# Altium PCB CatToy2.PcbDoc
Units mm, origin at the board's own origin, x right, y up, seen from the top; angles counter-clockwise.
Board outline 47.37 x 20.57 mm, 2 copper layers (Top Layer, Bottom Layer); 18 components, 16 nets, 69 pads, 10 vias.
Unrouted connection lines stored in the file: 15.
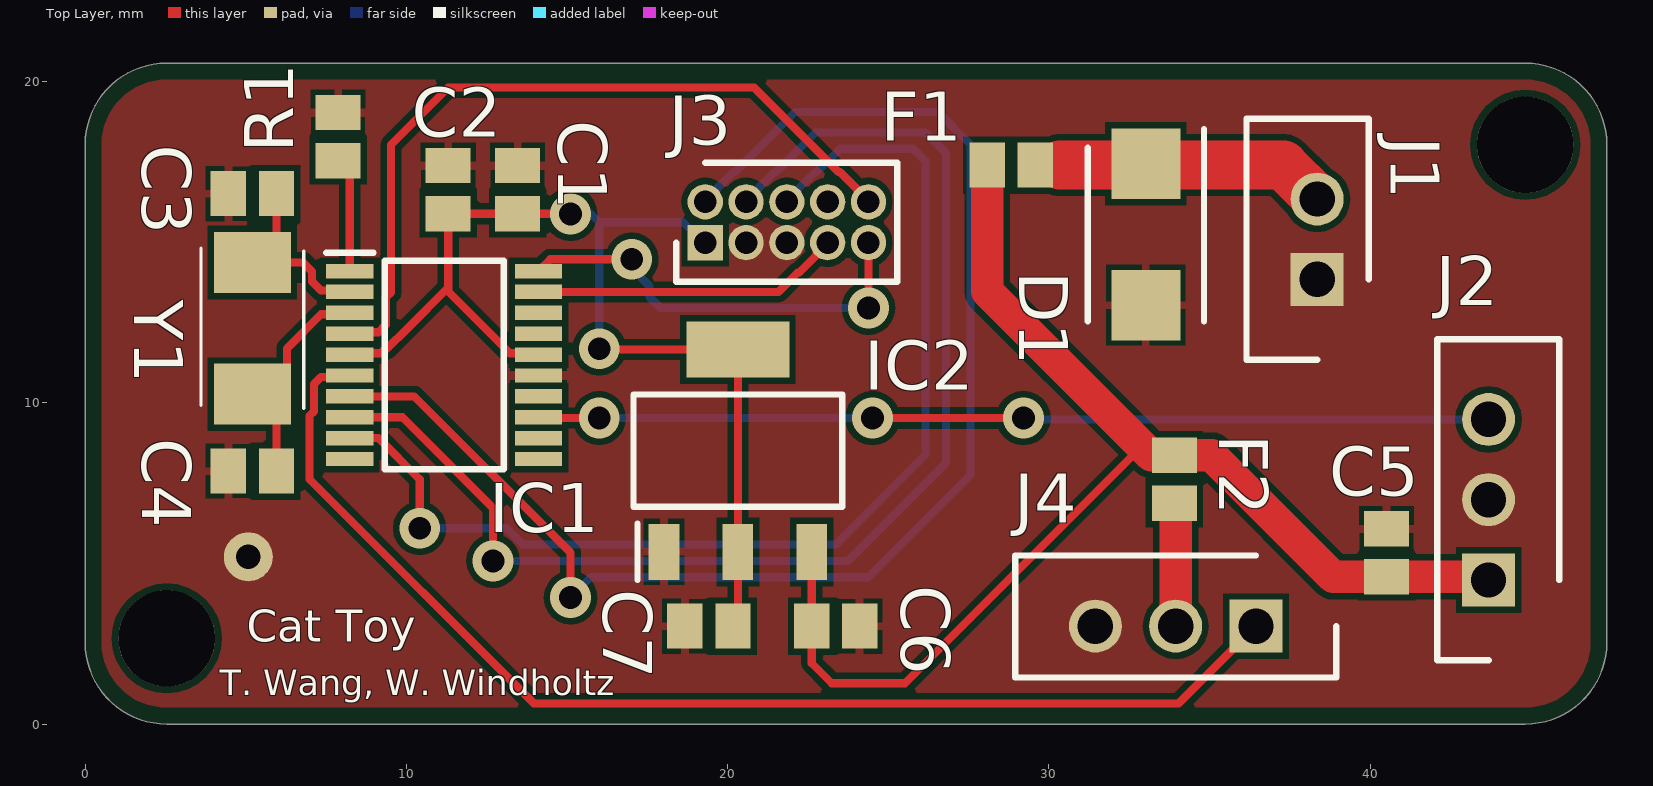
[diagram p0: Top Layer view]
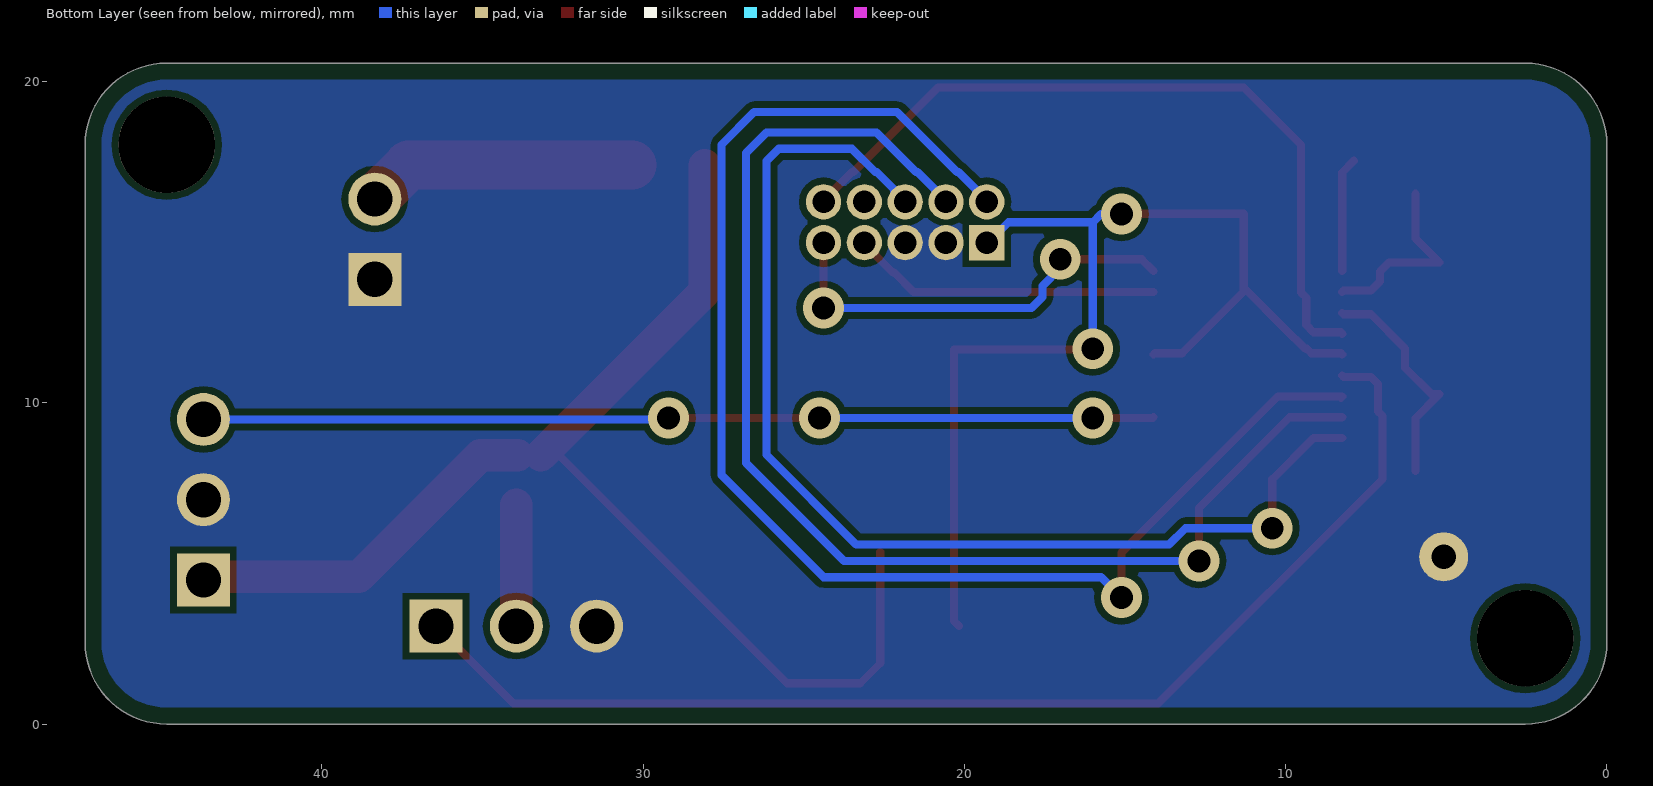
[diagram p1: Bottom Layer view, seen from below]

## Layer stack, top to bottom
Top Solder: solder mask 0.0102, Solder Resist, Dk 3.5
Top Layer: signal copper 0.0356
Dielectric 1: dielectric 0.32, FR-4, Dk 4.8
Bottom Layer: signal copper 0.0356
Bottom Solder: solder mask 0.0102, Solder Resist, Dk 3.5

## Board outline
2.54,0 cw(c2.54,2.54) 0,2.54 0,18.034 cw(c2.54,18.034) 2.54,20.574 44.831,20.574 cw(c44.831,18.034) 47.371,18.034 47.371,2.54 cw(c44.831,2.54) 44.831,0

## Design rules (kind name [scope] priority, off if disabled: settings)
BoardOutlineClearance [All] p1: gap=0.508 ignorepadtopadclearanceinfootprint=FALSE
Clearance Clearance_HighV [InNet('24V') Or InNet('MOTOR_M') Or InNet('MOTOR_P') vs InNet('GND') Or InNet('MOTOR_M') Or InNet('MOTOR_P')] p1: gap=0.381 ignorepadtopadclearanceinfootprint=TRUE
Clearance Clearance_Mounting [(HasFootprint('MOUNTING_HOLE'))] p2: gap=1.016 ignorepadtopadclearanceinfootprint=TRUE except(0: Arc-Hole Track-Hole SMDPad-Hole THPad-Hole Via-Hole Fill-Hole Poly-Hole Region-Hole Text-Hole; 0.508: Arc-Arc Arc-Track Arc-SMDPad Track-Track Track-SMDPad SMDPad-SMDPad)
Clearance [All] p3: gap=0.152 ignorepadtopadclearanceinfootprint=TRUE except(0: Arc-Hole Track-Hole SMDPad-Hole THPad-Hole Via-Hole Fill-Hole Poly-Hole Region-Hole Text-Hole; 0.203: Arc-Fill Arc-Poly Arc-Region Track-Fill Track-Poly Track-Region SMDPad-Fill SMDPad-Poly SMDPad-Region THPad-Fill THPad-Poly THPad-Region Via-Fill Via-Poly Via-Region Fill-Fill Fill-Poly Fill-Region Poly-Poly Poly-Region Region-Region)
ComponentClearance "HM-TRP & UFL" [InComponent('X1') vs InComponent('U1')] p1: gap=0 collisioncheckmode=3 verticalgap=0 showdistances=FALSE
ComponentClearance [All] p2: gap=0.025 collisioncheckmode=3 verticalgap=0.025 showdistances=FALSE
DiffPairsRouting [All] p1: maxlimit=10 minlimit=0.127 mostfreqgap=0.203 toplayer_minwidth=0.127 toplayer_maxwidth=0.381 toplayer_prefwidth=0.203 bottomlayer_minwidth=0.127 bottomlayer_maxwidth=0.381 bottomlayer_prefwidth=0.203 maxuncoupledlength=12.7
Height [All] p1: minheight=0 maxheight=50.8 prefheight=12.7
HoleSize [All] p1: absolutevalues=TRUE maxlimit=6.731 minlimit=0.254 maxpercent=80.000 minpercent=20.000
HoleToHoleClearance [All] p1: gap=0.254 allowstackedmicrovias=FALSE
MinimumAnnularRing [All] p1: minimumring=0.102
MinimumSolderMaskSliver [All] p1: minsoldermaskwidth=0
PlaneClearance [All] p1: clearance=0.254
PlaneConnect [All] p1: planeconnectstyle=Relief reliefexpansion=0.102 reliefentries=4 reliefconductorwidth=0.152 reliefairgap=0.152
PolygonConnect "Via connect style" [isVia] p1: connectstyle=Direct reliefconductorwidth=0.254 reliefentries=4 polygonreliefangle="90 Angle" airgapwidth=0.254
PolygonConnect [All] p2: thpad.connectstyle=Direct thpad.reliefconductorwidth=0.254 thpad.reliefentries=4 thpad.polygonreliefangle="90 Angle" thpad.airgapwidth=0.152 smdpad.connectstyle=Relief smdpad.reliefconductorwidth=0.254 smdpad.reliefentries=4 smdpad.polygonreliefangle="90 Angle" smdpad.airgapwidth=0.152 via.connectstyle=Direct via.reliefconductorwidth=0.254 via.reliefentries=4 via.polygonreliefangle="90 Angle" via.airgapwidth=0.152
RoutingCorners [All] p1: cornerstyle=45-Degree minsetback=1.25 maxsetback=1.25
RoutingVias [All] p1: holewidth=0.305 width=0.559 viastyle="Through Hole" minholewidth=0.254 minwidth=0.457 maxholewidth=2.54 maxwidth=2.896
SilkToSilkClearance [All] p1: silktosilkclearance=0
SilkToSolderMaskClearance [IsPad] p1: minsilkscreentomaskgap=0.127 clearancetoexposedcopper=TRUE
SolderMaskExpansion [All] p1: expansion=0.064 istentingtop=FALSE
Width [All] p1: maxlimit=10.16 minlimit=0.152 preferedwidth=0.203
19 further rules are at their usual default settings.

## Components (designator, comment, footprint, x,y, rotation, side; value= is the part's Value field where it differs from the comment)
C1 "Cap" C0805 13.462,16.637 r270 top value=10nF
C2 "Cap" C0805 11.303,16.637 r270 top value=1uF
C3 "Cap" C0805 5.207,16.51 r0 top value=4pF
C4 "Cap" C0805 5.207,7.874 r0 top value=4pF
C5 "Cap" C0805 40.513,5.334 r270 top value=10uF
C6 "Cap2" C0805 23.368,3.048 r0 top value=10uF
C7 "Cap2" C0805 19.419,3.048 r180 top value=100uF
D1 "SMBJ5.0A" DIOM5436X244N 33.02,15.24 r270 top
F1 "2A" C0805 28.829,17.399 r180 top
F2 "1.5A" C0805 33.909,7.62 r270 top
IC1 "STM32F030F4P6TR" SOP65P640X120-20N 11.176,11.176 r0 top
IC2 "TLV1117-33IDCYR" SOT230P700X180-4N 20.32,8.509 r90 top
J1 "B2B-EH-A" SHDR2W64P0X250_1X2_750X380X600P 38.354,13.843 r90 top
J2 "B3B-EH-A" SHDR3W64P0X250_1X3_1000X380X600P 43.688,4.485 r90 top
J3 "GRPB052VWVN-RC" HDRV10W50P127_2X5_635X340X430P 19.304,14.986 r0 top
J4 "B3B-EH-A" SHDR3W64P0X250_1X3_1000X380X600P 36.449,3.048 r180 top
R1 "Res1" C0805 7.874,18.288 r270 top value=1K
Y1 "CX5032GB08000H0HPQZ1" CX5032GB08000H0HPQZ1 5.207,12.319 r90 top

## Footprints (in the part's own frame and the unit in brackets; to place one, negate y for a bottom-side part, rotate by r counter-clockwise, add the part's x,y. Pads: shape width x height; smd on the part's side, far side on the other; paste and mask are expansions set on the pad)
C0805 [mm] "Chip Capacitor, Body 2.0x1.3mm, IPC High Density"
  rect 1.1x1.4 smd: 1(-0.75,0) 2(0.75,0)
  body extent -1.1,-0.72 1.1,0.72, height 1.4
CX5032GB08000H0HPQZ1 [mm]
  rect 1.9x2.4 smd: 1(-2.05,0) 2(2.05,0)
  silkscreen extent -2.5,-1.6 2.5,1.6, body extent -2.81,-1.6 2.81,1.6, height 1.2
DIOM5436X244N [mm]
  rect 2.2x2.15 smd: 1(-2.2,0) 2(2.2,0)
  silkscreen extent -3.27,-1.81 2.7,1.81, body extent -2.7,-1.81 2.7,1.81, height 2.44
HDRV10W50P127_2X5_635X340X430P [mm]
  rect 1.1x1.1 hole 0.7: 1(0,0)
  round 1.1 hole 0.7: 2(0,1.27) 3(1.27,0) 4(1.27,1.27) 5(2.54,0) 6(2.54,1.27) 7(3.81,0) 8(3.81,1.27) 9(5.08,0) 10(5.08,1.27)
  silkscreen extent -0.9,-1.21 5.98,2.48, body extent -0.64,-1.06 5.71,2.33, height 4.3
SHDR2W64P0X250_1X2_750X380X600P [mm]
  rect 1.65x1.65 hole 1.1: 1(0,0)
  round 1.65 hole 1.1: 2(2.5,0)
  silkscreen extent -2.5,-1.6 5,2.2, body extent -2.5,-1.9 5,1.9, height 6
SHDR3W64P0X250_1X3_1000X380X600P [mm]
  rect 1.65x1.65 hole 1.1: 1(0,0)
  round 1.65 hole 1.1: 2(2.5,0) 3(5,0)
  silkscreen extent -2.5,-2.2 7.5,1.6, body extent -2.5,-1.9 7.5,1.9, height 6
SOP65P640X120-20N [mm]
  rect 1.475x0.45 smd: 1(-2.938,2.925) 2(-2.938,2.275) 3(-2.938,1.625) 4(-2.938,0.975) 5(-2.938,0.325) 6(-2.938,-0.325) 7(-2.938,-0.975) 8(-2.938,-1.625) 9(-2.938,-2.275) 10(-2.938,-2.925) 11(2.938,-2.925) 12(2.938,-2.275) 13(2.938,-1.625) 14(2.938,-0.975) 15(2.938,-0.325) 16(2.938,0.325) 17(2.938,0.975) 18(2.938,1.625) 19(2.938,2.275) 20(2.938,2.925)
  silkscreen extent -3.67,-3.25 1.85,3.5, body extent -3.2,-3.25 3.2,3.25, height 1.2
SOT230P700X180-4N [mm]
  rect 1.75x0.95 smd: 1(-3.15,2.3) 2(-3.15,0) 3(-3.15,-2.3)
  rect 1.75x3.2 smd: 4(3.15,0)
  silkscreen extent -4.03,-3.25 1.75,3.25, body extent -3.5,-3.25 3.5,3.25, height 1.8

## Part data
C1 C2 C3 C4 C5 C6 C7: "Capacitor", Publisher="Altium Limited"
  C1 C2 C3 C4 C5: LatestRevisionDate=17-Jul-2002, LatestRevisionNote="Re-released for DXP Platform.", PackageDescription="Radial Cap, Thru-Hole; 2 Leads; 0.3 in Pin Spacing", PackageReference=RAD-0.3, Published=8-Jun-2000
  C6 C7: PackageDescription="Capacitor; 2 Leads", PackageReference=CAPR5-4X5, Published=23-Sep-2002
D1: "TVS Diode (Uni-directional)", Manufacturer_Name=Vishay, Arrow Part Number=SMBJ5.0A, Datasheet Link=http://www.vishay.com/docs/88392/smbj.pdf, Height=2.44mm, Manufacturer_Part_Number=SMBJ5.0A
F1 F2: library part "Fuse 2", "Fuse", LatestRevisionDate=17-Jul-2002, LatestRevisionNote="Re-released for DXP Platform.", PackageDescription="Thru-Hole; 2 Leads", PackageReference=PIN-W2/E2.8, Published=8-Jun-2000, Publisher="Altium Limited"
IC1: "Integrated Circuit", Manufacturer_Name=STMicroelectronics, Mouser Part Number=511-STM32F030F4P6TR, Arrow Part Number=STM32F030F4P6TR, Arrow Price/Stock=https://www.arrow.com/en/products/stm32f030f4p6tr/stmicroelectronics, Datasheet Link=https://www.st.com/resource/en/datasheet/stm32f030rc.pdf, Height=1.2mm, Manufacturer_Part_Number=STM32F030F4P6TR, Mouser Price/Stock=https://www.mouser.co.uk/ProductDetail/STMicroelectronics/STM32F030F4P6TR?qs=MavH1QghrkE4yfyLOfvVsw%3D%3D
IC2: library part TLV1117-33CDCYR, "Integrated Circuit", Manufacturer_Name="Texas Instruments", Mouser Part Number=595-TLV1117-33CDCYR, Arrow Part Number=TLV1117-33CDCYR, Arrow Price/Stock=https://www.arrow.com/en/products/tlv1117-33cdcyr/texas-instruments, Datasheet Link=http://www.ti.com/lit/gpn/tlv1117, Height=1.8mm, Manufacturer_Part_Number=TLV1117-33CDCYR, Mouser Price/Stock=https://www.mouser.co.uk/ProductDetail/Texas-Instruments/TLV1117-33CDCYR?qs=p6lVfQR1GSoiRKz8KGIbKg%3D%3D
J1 J2 J4: "Connector", Manufacturer_Name="JST (JAPAN SOLDERLESS TERMINALS)", Height=6mm
  J1: Arrow Part Number=B2B-EH-A, Datasheet Link=http://www.jst-mfg.com/product/pdf/eng/eEH.pdf, Manufacturer_Part_Number=B2B-EH-A
  J2 J4: Arrow Part Number=B3B-EH-A, Datasheet Link=https://datasheet.datasheetarchive.com/originals/dk/DKDS-2/32954.pdf, Manufacturer_Part_Number=B3B-EH-A
J3: "Connector", Manufacturer_Name=Sullins, Arrow Part Number=GRPB052VWVN-RC, Datasheet Link=https://media.digikey.com/pdf/Data%20Sheets/Sullins%20PDFs/GRPB_%20_2VWVN-RC%2010954-C.pdf, Height=4.3mm, Manufacturer_Part_Number=GRPB052VWVN-RC
R1: "Resistor", LatestRevisionDate=17-Jul-2002, LatestRevisionNote="Re-released for DXP Platform.", PackageDescription="Axial Device, Thru-Hole; 2 Leads; 0.3 in Pin Spacing", PackageReference=AXIAL-0.3, Published=8-Jun-2000, Publisher="Altium Limited"
Y1: "Crystal or Oscillator", Manufacturer_Name="Kyocera Electronic Components", Mouser Part Number=581-CX532GB8HHPQZ1, Arrow Part Number=CX5032GB08000H0HPQZ1, Datasheet Link=https://media.digikey.com/pdf/Data%20Sheets/AVX%20PDFs/CX5032GB0yyyyyH0HPQZ1_Series_Spec.pdf, Height=1.1mm, Manufacturer_Part_Number=CX5032GB08000H0HPQZ1, Mouser Price/Stock=https://www.mouser.co.uk/ProductDetail/Kyocera-Electronic-Components/CX5032GB08000H0HPQZ1?qs=mFMVSnANsC2SO%252B6cjFFj8w%3D%3D

## Free pads (board coordinates)
  round 1.524 hole 0.762: 4(5.08,5.207)
  round 3 hole 3: MOUNT1(2.54,2.667) MOUNT2(44.831,18.034)

## Via types
v1: diameter 1.27, hole 0.711, Top Layer to Bottom Layer, 10 vias

## Nets (pads, with @x,y where several pads share a name; then routed paths per layer and width w, separated by ;. In a path a pad name is that pad's centre, name@x,y a point inside that pad or via, vN(x,y) a via of type N, cw(c..) or ccw(c..) an arc to the next point about the centre after c; other vN are vias at no path point)
+3.3V: C1.2 C2.2 C7.1 IC1.5 IC1.16 IC2.2 IC2.4 J3.1 | length 35.3
  Top Layer w0.254: IC1.5 8.282,11.545 9.202,11.545 9.344,11.687 9.401,11.687 10.033,12.319 11.303,13.589 ; IC1.16 14.07,11.545 13.219,11.545 11.303,13.461 C2.2 C1.2 15.101,15.887 v1(15.113,15.875) ; v1(16.002,11.684) 16.027,11.659 IC2.4 IC2.2 20.32,3.199 C7.1
  Bottom Layer w0.254: v1(15.113,15.875) 15.748,15.875 16.002,15.621 ; v1(16.002,11.684) 16.002,15.621 ; J3.1 18.965,15.325 18.918,15.325 18.622,15.621 16.002,15.621
+5V: C5.2 C6.1 F1.2 F2.1 IC2.3 J2.1 | length 40.5
  Top Layer w0.254: IC2.3@22.618,5.357 IC2.3 22.62,3.05 C6.1 22.618,1.893 23.241,1.27 25.527,1.27 32.627,8.37 33.183,8.37 F2.1 ; J2.1@43.589,4.584 J2.1
  Top Layer w1.016: F1.2 28.079,13.474 33.183,8.37 ; F2.1 35.064,8.37 38.85,4.584 C5.2 J2.1@43.589,4.584
GND: C1.1 C2.1 C3.1 C4.1 C5.1 C6.2 C7.2 D1.2 IC1.15 IC2.1 J1.1 J2.2 J3.3 J3.5 J4.3 pad.4 R1.1
NetC3_2: C3.2 IC1.2 Y1.2 | length 6
  Top Layer w0.254: C3.2 5.957,15.119 Y1.2 6.788,14.369 7.065,14.092 7.065,13.772 7.343,13.495 8.194,13.495 IC1.2
NetC4_2: C4.2 IC1.3 Y1.1 | length 7.1
  Top Layer w0.254: C4.2 5.957,9.519 Y1.1 5.457,10.269 6.28,11.092 6.28,11.694 7.343,12.757 8.194,12.757 IC1.3
NetD1_1: D1.1 F1.1 J1.2 | length 8.5
  Top Layer w0.254: D1.1@32.979,17.399 D1.1
  Top Layer w1.524: 30.353,17.399 32.979,17.399 37.298,17.399 J1.2
NetF2_2: F2.2 J4.2 | length 3.8
  Top Layer w0.254: F2.2 F2.2@33.949,6.83
  Top Layer w1.016: J4.2 F2.2@33.949,6.83
NetIC1_1: IC1.1 R1.2 | length 3.6
  Top Layer w0.254: R1.2 8.238,17.174 IC1.1
NRESET: IC1.4 J3.10 | length 24
  Top Layer w0.254: IC1.4 8.282,12.195 9.133,12.195 9.357,12.418 9.357,13.27 9.525,13.438 9.525,18.034 11.303,19.812 20.828,19.812 23.453,17.187 23.5,17.187 24.045,16.642 24.045,16.595 J3.10
PROX_SENSOR: IC1.13 J2.3 | length 29.6
  Top Layer w0.254: IC1.13 14.14,9.525 v1(16.002,9.525) ; v1(24.511,9.525) v1(29.21,9.525)
  Bottom Layer w0.254: v1(16.002,9.525) v1(24.511,9.525) ; v1(29.21,9.525) 29.25,9.485 J2.3
SERVO: IC1.6 J4.1 | length 37.6
  Top Layer w0.254: IC1.6 8.194,10.807 7.343,10.807 7.119,10.584 7.119,9.732 6.985,9.598 6.985,7.62 13.97,0.635 34.036,0.635 J4.1
SWCLK: IC1.20 J3.9 | length 13.4
  Top Layer w0.254: IC1.20 14.48,14.467 v1(17.018,14.467) ; v1(24.384,12.954) J3.9
  Bottom Layer w0.254: v1(17.018,14.467) 17.018,14.192 17.572,13.638 17.572,13.289 17.907,12.954 v1(24.384,12.954)
SWDIO: IC1.19 J3.7 | length 9.7
  Top Layer w0.254: IC1.19 21.579,13.451 22.183,14.055 22.23,14.055 22.775,14.6 22.775,14.647 J3.7 J3.7@23.114,14.939
UART_RTS: IC1.7 J3.2 | length 44.5
  Top Layer w0.254: IC1.7@8.279,10.16 IC1.7 10.246,10.201 15.113,5.334 v1(15.113,3.937)
  Bottom Layer w0.254: v1(15.113,3.937) 15.748,4.572 24.384,4.572 27.559,7.747 27.559,18.034 26.543,19.05 22.098,19.05 20.235,17.187 20.188,17.187 19.643,16.642 19.643,16.595 J3.2
UART_RX: IC1.9 J3.6 | length 35.7
  Top Layer w0.254: IC1.9 9.133,8.901 10.414,7.62 v1(10.414,6.096)
  Bottom Layer w0.254: v1(10.414,6.096) 13.121,6.096 13.629,5.588 23.368,5.588 26.162,8.382 26.162,17.526 25.781,17.907 23.495,17.907 22.775,17.187 22.728,17.187 22.183,16.642 22.183,16.595 J3.6
UART_TX: IC1.8 J3.4 | length 39.7
  Top Layer w0.254: IC1.8 9.88,9.551 12.7,6.731 v1(12.7,5.08)
  Bottom Layer w0.254: v1(12.7,5.08) 23.749,5.08 26.797,8.128 26.797,17.78 26.162,18.415 22.733,18.415 21.505,17.187 21.458,17.187 20.913,16.642 20.913,16.595 J3.4
pads on no net: IC1.10 IC1.11 IC1.12 IC1.14 IC1.17 IC1.18 J3.8

## Polygon pours and split planes (outlines as drawn)
GND on Top Layer "GND_L01_P000" (solid, remove dead copper, pour order 0): 2.54,0 cw(c2.54,2.54) 0,2.54 0,18.034 cw(c2.54,18.034) 2.54,20.574 44.831,20.574 cw(c44.831,18.034) 47.371,18.034 47.371,2.54 cw(c44.831,2.54) 44.831,0
GND on Bottom Layer "GND_L02_P001" (solid, remove dead copper, pour order 1): 2.54,0 cw(c2.54,2.54) 0,2.54 0,18.034 cw(c2.54,18.034) 2.54,20.574 44.831,20.574 cw(c44.831,18.034) 47.371,18.034 47.371,2.54 cw(c44.831,2.54) 44.831,0

## Silkscreen, mask and mechanical layers (free items; w line width, h text height)
Top Overlay:
  text "Cat Toy" at 5.026,2.565 h1
  text "T. Wang, W. Windholtz" at 4.191,0.902 h0.8